# Altium PCB PCB2.PcbDoc (part 1 of 2)
Units mil, origin at the board's own origin, x right, y up, seen from the top; angles counter-clockwise.
Board outline 3937.01 x 3937.01 mil, 2 copper layers (Top Layer, Bottom Layer); 157 components, 107 nets, 472 pads, 34 vias.
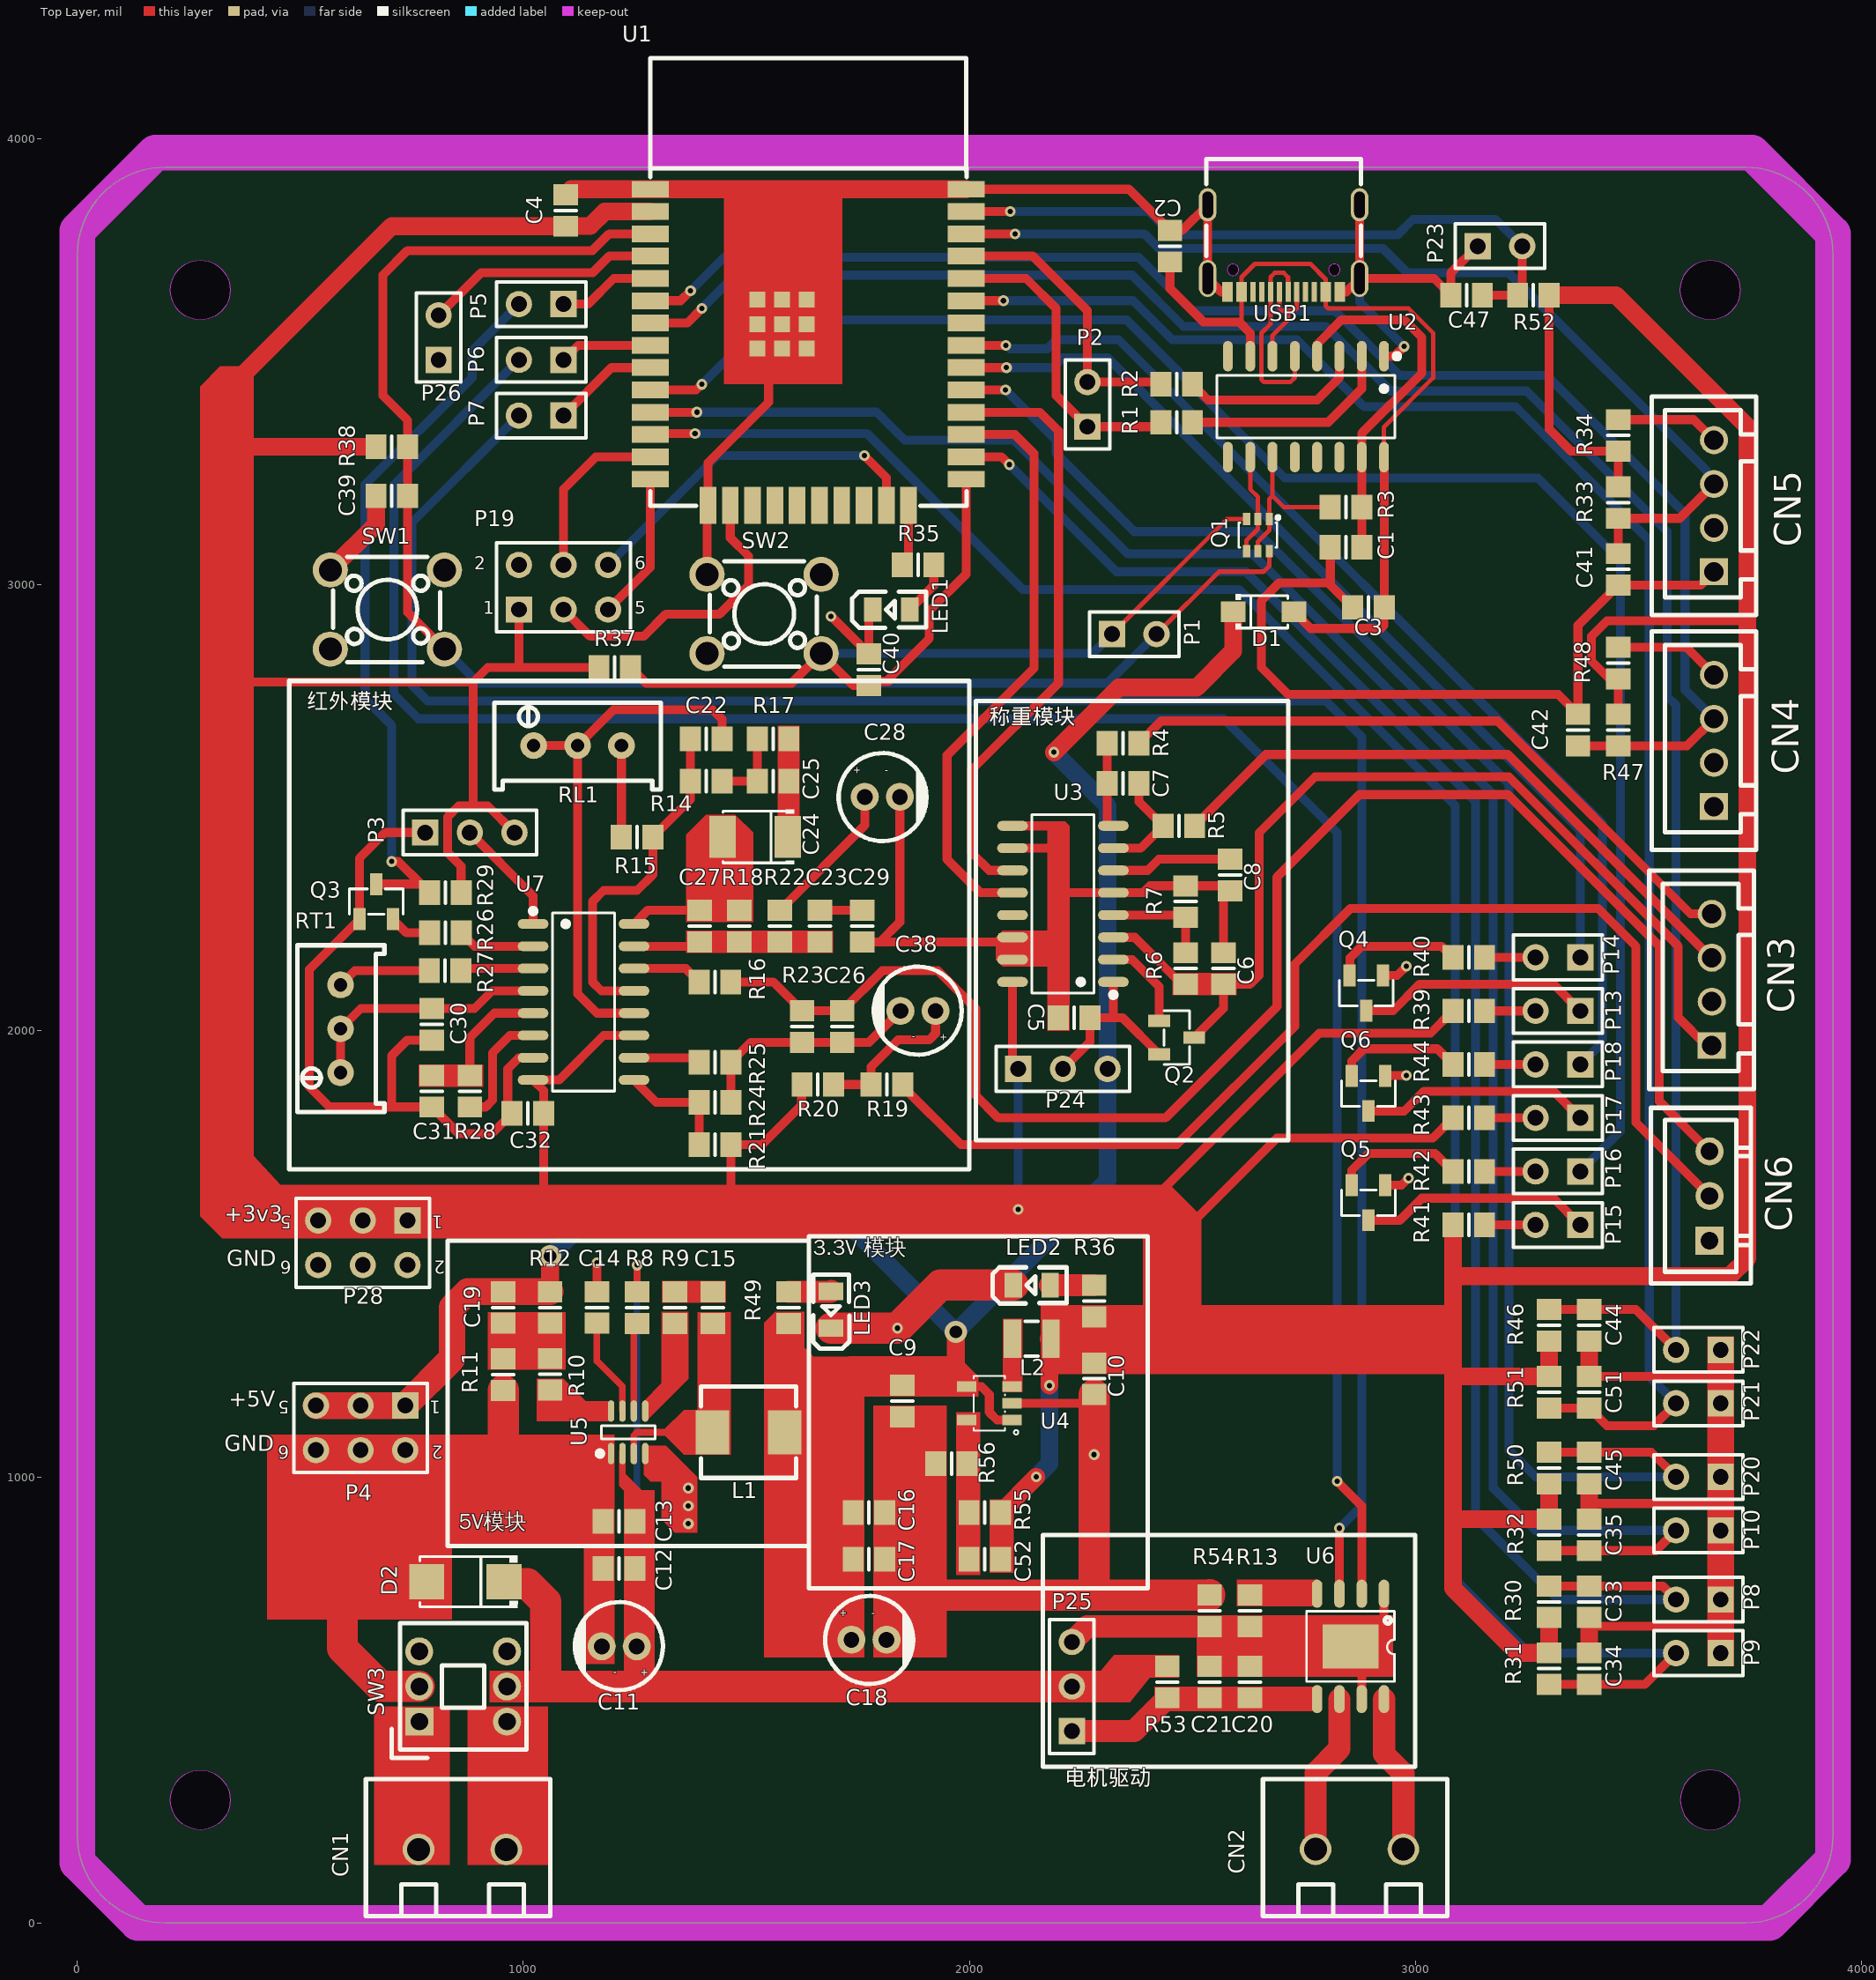
[diagram p0: Top Layer view]
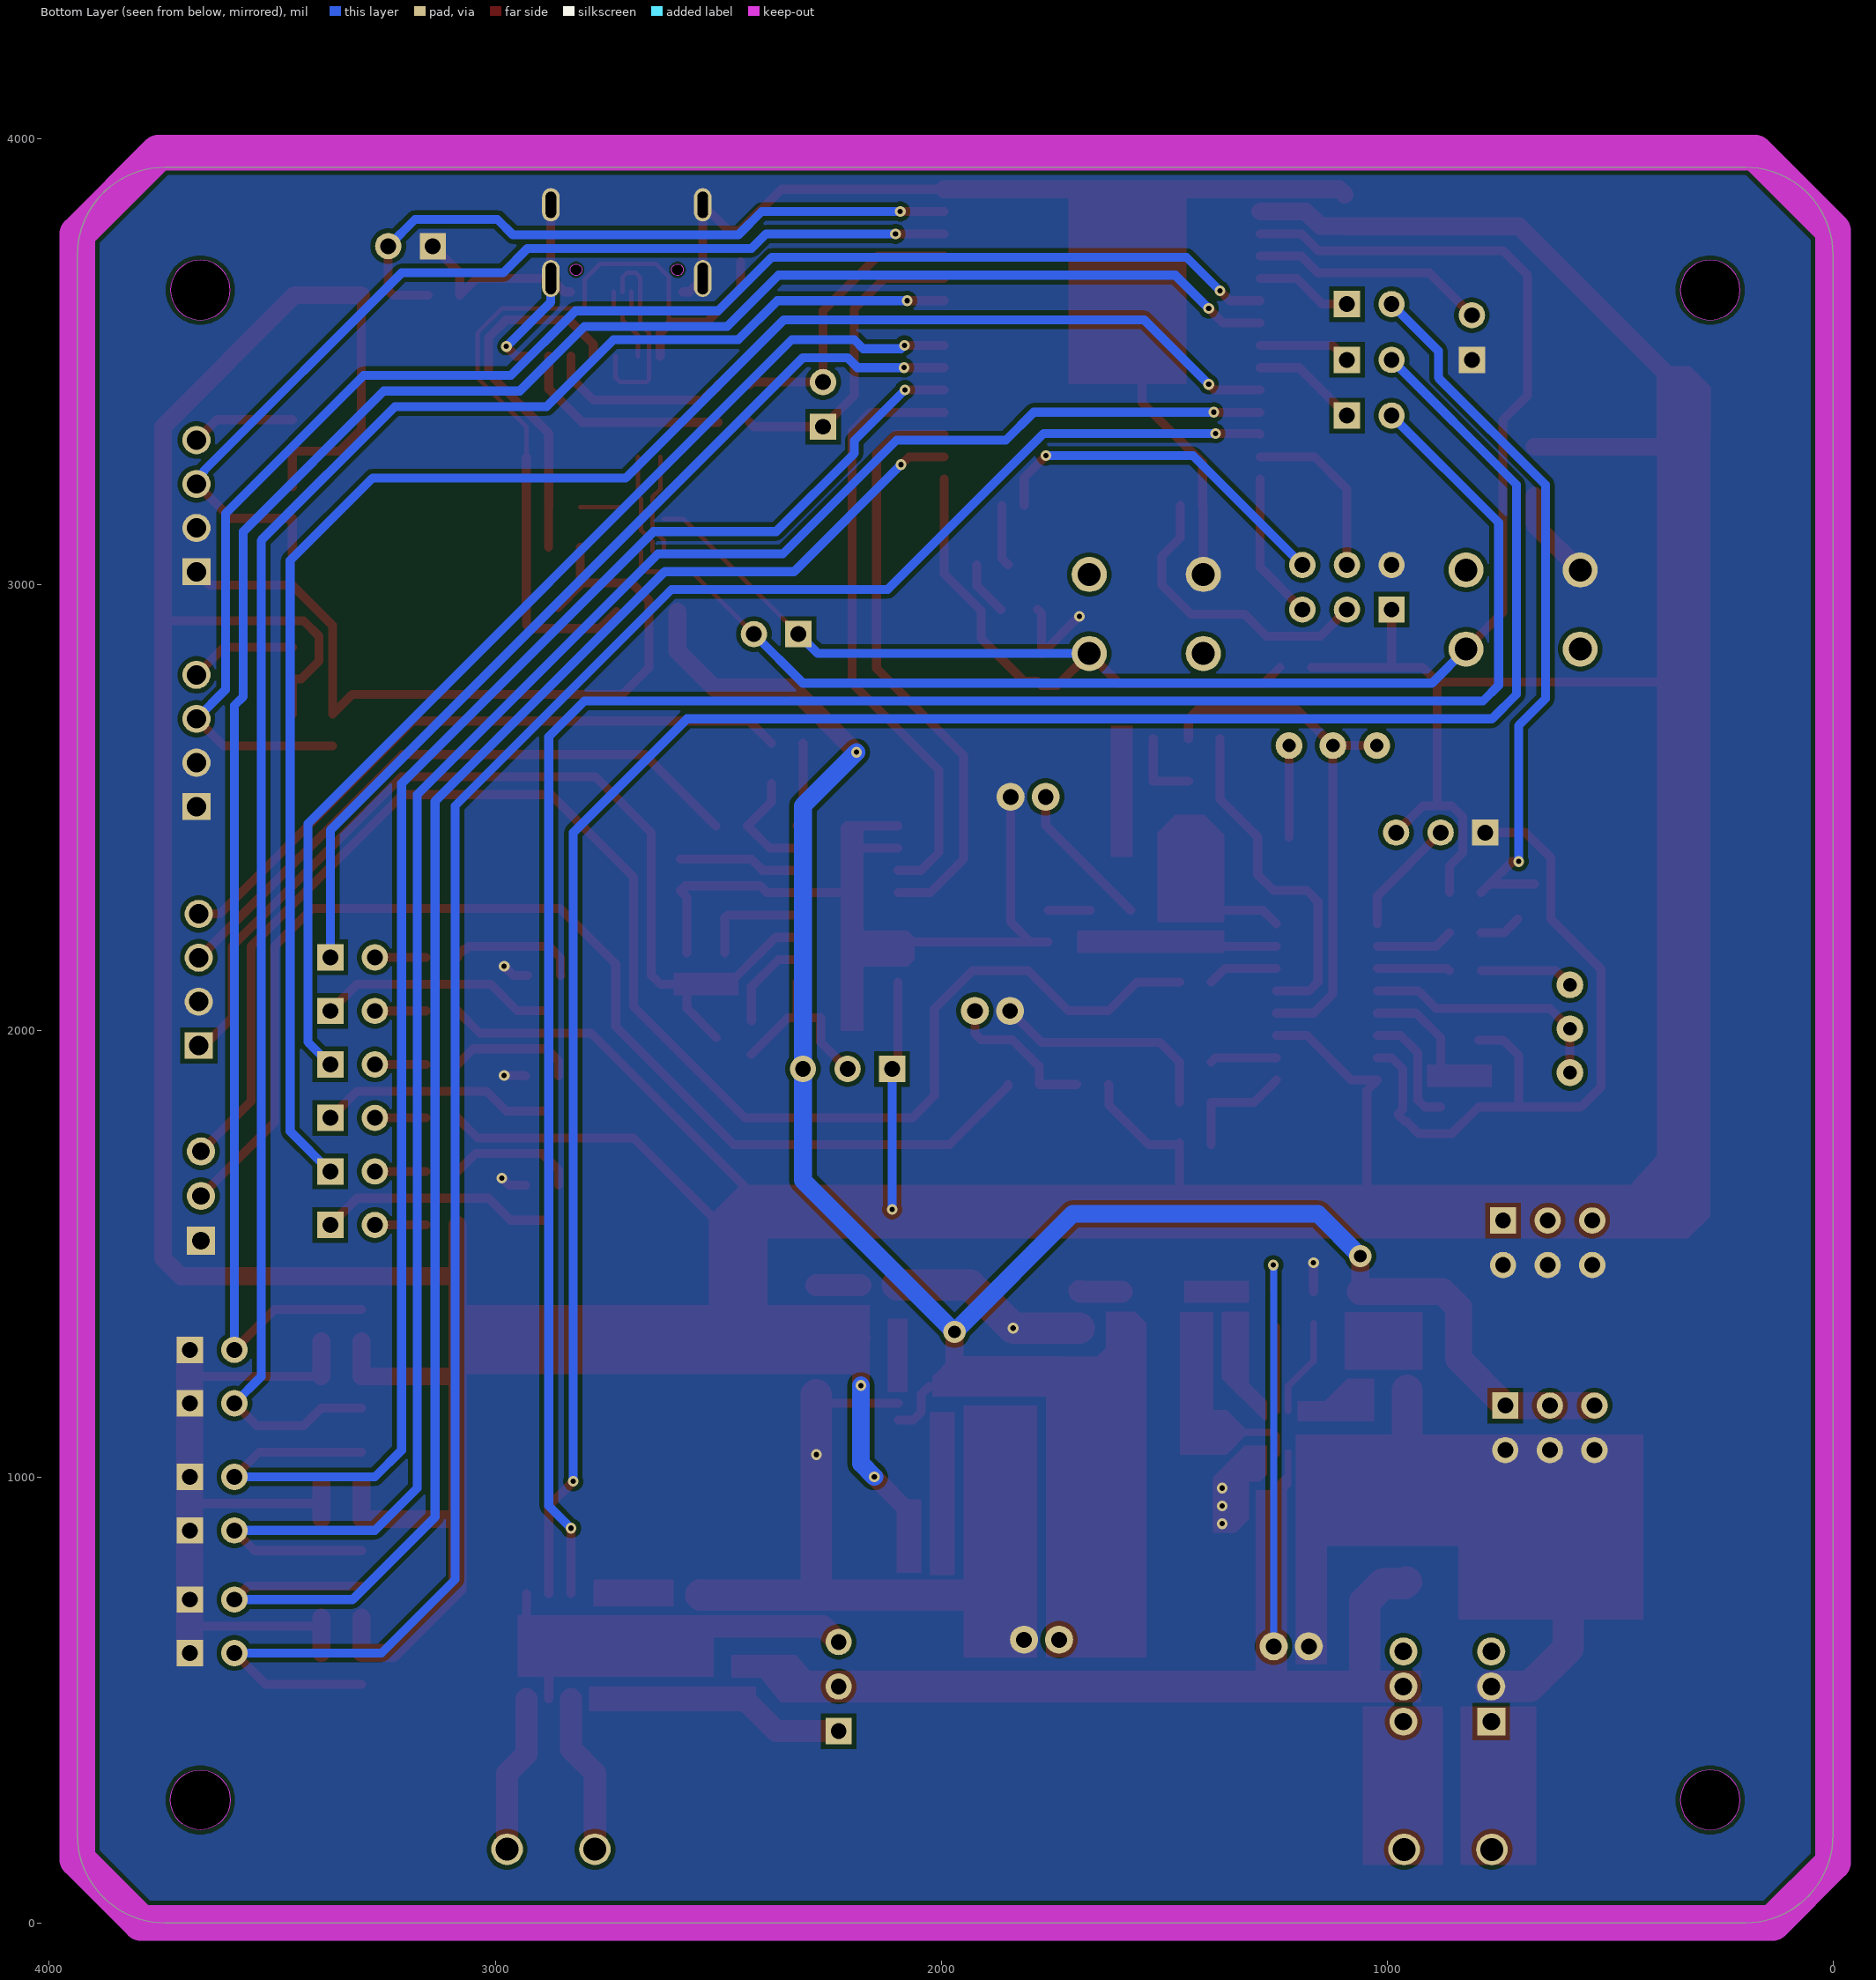
[diagram p1: Bottom Layer view, seen from below]

## Layer stack, top to bottom
Top Solder: solder mask 0.4, Solder Resist, Dk 3.5
Top Layer: signal copper 1.4
Dielectric 1: dielectric 12.6, FR-4, Dk 4.8
Bottom Layer: signal copper 1.4
Bottom Solder: solder mask 0.4, Solder Resist, Dk 3.5

## Board outline
0,196.85 0,3740.16 cw(c196.85,3740.16) 196.85,3937.01 3740.16,3937.01 cw(c3740.16,3740.16) 3937.01,3740.16 3937.01,196.85 cw(c3740.16,196.85) 3740.16,0 196.85,0 cw(c196.85,196.85)
cut-out: 3661.42,3594.49 cw(c3661.42,3661.42) 3594.49,3661.42 cw(c3661.42,3661.42) 3661.42,3728.35 cw(c3661.42,3661.42) 3728.35,3661.42 cw(c3661.42,3661.42)
cut-out: 275.59,3594.49 cw(c275.59,3661.42) 208.66,3661.42 cw(c275.59,3661.42) 275.59,3728.35 cw(c275.59,3661.42) 342.52,3661.42 cw(c275.59,3661.42)
cut-out: 275.59,208.66 cw(c275.59,275.59) 208.66,275.59 cw(c275.59,275.59) 275.59,342.52 cw(c275.59,275.59) 342.52,275.59 cw(c275.59,275.59)
cut-out: 3594.49,275.59 ccw(c3661.42,275.59) 3661.42,208.66 ccw(c3661.42,275.59) 3728.35,275.59 ccw(c3661.42,275.59) 3661.42,342.52 ccw(c3661.42,275.59)

## Design rules (kind name [scope] priority, off if disabled: settings)
Clearance Clearance_USB [InComponent('USB1') or InComponent('Q1') or InNet('D+') or InNet('D-')] p1: gap=5 ignorepadtopadclearanceinfootprint=FALSE except(0: Arc-Hole Track-Hole SMDPad-Hole THPad-Hole Via-Hole Fill-Hole Poly-Hole Region-Hole Text-Hole)
Clearance [All] p2: gap=10 ignorepadtopadclearanceinfootprint=FALSE except(0: Arc-Hole Track-Hole SMDPad-Hole THPad-Hole Via-Hole Fill-Hole Poly-Hole Region-Hole Text-Hole)
PolygonConnect [All] p1: connectstyle=Direct reliefconductorwidth=10 reliefentries=4 polygonreliefangle="90 Angle" airgapwidth=10
RoutingVias [All] p1: holewidth=12 width=24 viastyle="Through Hole" minholewidth=12 minwidth=24 maxholewidth=12 maxwidth=24
SolderMaskExpansion [All] p1: expansion=4 istentingtop=FALSE
Width [All] p1: maxlimit=70 minlimit=10 preferedwidth=10
30 further rules are at their usual default settings.

## Classes and differential pairs
component class Sensor: C5 C6 C7 C8 C22 C23 C24 C25 C26 C27 C28 C29 C30 C31 C32 C38 CN3 CN6 P3 P24 Q2 Q3 R4 R5 R6 R7 R14 R15 R16 R17 R18 R19 R20 R21 R22 R23 R24 R25 R26 R27 R28 R29 RL1 RT1 U3 U7
component class Power: C9 C10 C11 C12 C13 C14 C15 C16 C17 C18 C19 C20 C21 C52 CN1 CN2 D2 L1 L2 LED2 LED3 P4 P28 R8 R9 R10 R11 R12 R13 R36 R49 R53 R54 R55 R56 SW3 U4 U5 U6
component class IO: C33 C34 C35 C44 C45 C51 P5 P6 P7 P8 P9 P10 P13 P14 P15 P16 P17 P18 P20 P21 P22 Q4 Q5 Q6 R30 R31 R32 R39 R40 R41 R42 R43 R44 R46 R50 R51
component class IO2: C41 C42 C47 CN4 CN5 P23 P25 P26 R33 R34 R47 R48 R52
component class Core: C1 C2 C3 C4 C39 C40 D1 LED1 P1 P2 P19 Q1 R1 R2 R3 R35 R37 R38 SW1 SW2 U1 U2 USB1

## Components (designator, comment, footprint, x,y, rotation, side; value= is the part's Value field where it differs from the comment)
C1 "Cap" 6-0805_N 2845,3085 r180 top value=100nF
C2 "Cap" 6-0805_N 2450,3760 r90 top value=10uF
C3 "Cap" 6-0805_N 2895,2950 r180 top value=100nF
C4 "Cap" 6-0805_N 1095,3840 r270 top value=100nF
C5 "Cap" 6-0805_N 2235,2030 r0 top value=10uF
C6 "Cap" 6-0805_N 2570,2140 r270 top value=10uF
C7 "Cap" 6-0805_N 2345,2555 r0 top value=100nF
C8 "Cap" 6-0805_N 2585,2350 r270 top value=100nF
C9 "Cap" 6-0805_N 1850,1170 r90 top value=22uF
C10 "Cap" 6-0805_N 2280,1220 r90 top value=22uF
C11 "47uF" CAP-TH_BD5.0-P2.00-D0.5-FD-A 1215,620 r180 top
C12 "Cap" 6-0805_N 1214.57,795 r0 top value=22uF
C13 "Cap" 6-0805_N 1214.57,900 r0 top value=100nF
C14 "Cap" 6-0805_N 1165,1380 r270 top value=100nF
C15 "Cap" 6-0805_N 1425,1379.61 r90 top value=100uF
C16 "Cap" 6-0805_N 1775,920 r180 top value=22uF
C17 "Cap" 6-0805_N 1775,815 r180 top value=22uF
C18 "47uF" CAP-TH_BD5.0-P2.00-D0.5-FD-A 1775,635 r0 top
C19 "Cap" 6-0805_N 955,1380 r90 top value=33pF
C20 "Cap" 6-0805_N 2629,540 r90 top value=100nF
C21 "Cap" 6-0805_N 2539,540 r90 top value=47uF
C22 "Cap" 6-0805_N 1410,2655 r0 top value=10nF
C23 "Cap" 6-0805_N 1665,2235 r90 top value=5nF
C24 "22uF" CASE-B_3528 1520,2435 r180 top
C25 "Cap" 6-0805_N 1560,2560 r180 top value=100nF
C26 "Cap" 6-0805_N 1715,2010 r270 top value=10nF
C27 "Cap" 6-0805_N 1395,2235 r90 top value=10nF
C28 "47uF" CAP-TH_BD5.0-P2.00-D0.5-FD-A 1805,2525 r0 top
C29 "Cap" 6-0805_N 1760,2235 r90 top value=10nF
C30 "Cap" 6-0805_N 795,2015 r270 top value=10nF
C31 "Cap" 6-0805_N 795,1865 r270 top value=100nF
C32 "Cap" 6-0805_N 1010,1815 r180 top value=10nF
C33 "Cap" 6-0805_N 3390,720 r90 top value=100nF
C34 "Cap" 6-0805_N 3390,570 r270 top value=100nF
C35 "Cap" 6-0805_N 3390,870 r270 top value=100nF
C38 "47uF" CAP-TH_BD5.0-P2.00-D0.5-FD-A 1885,2045 r180 top
C39 "Cap" 6-0805_N 705,3200 r0 top value=100nF
C40 "Cap" 6-0805_N 1775,2810 r270 top value=100nF
C41 "Cap" 6-0805_N 3455,3035 r270 top value=100nF
C42 "Cap" 6-0805_N 3365,2675 r90 top value=100nF
C44 "Cap" 6-0805_N 3390,1340 r90 top value=100nF
C45 "Cap" 6-0805_N 3390,1020 r90 top value=100nF
C47 "Cap" 6-0805_N 3115,3650 r0 top value=100nF
C51 "Cap" 6-0805_N 3390,1190 r270 top value=100nF
C52 "Cap" 6-0805_N 2035,815 r180 top value=15pF
CN1 "MX126-5.0-02P-GN01-Cu-S-A" CONN-TH_2P-P5.00_MX126-5.0-GN01-02P-CU-S-A 863.42,164.61 r0 top
CN2 "MX126-5.0-02P-GN01-Cu-S-A" CONN-TH_2P-P5.00_MX126-5.0-GN01-02P-CU-S-A 2875,165 r0 top
CN3 "ZX-XH2.54-4PZZ" CONN-TH_4P-P2.50_4PIN 3665,2115 r90 top
CN4 "ZX-XH2.54-4PZZ" CONN-TH_4P-P2.50_4PIN 3670,2650.79 r90 top
CN5 "ZX-XH2.54-4PZZ" CONN-TH_4P-P2.50_4PIN 3670,3177.36 r90 top
CN6 "ZX-XH2.54-3PZZ" CONN-TH_3P-P2.54_2501S-3P 3660,1630 r90 top
D1 "DSK14" SOD-123FL_L2.7-W1.8-LS3.8-RD 2660,2940 r0 top
D2 "SMAJ12A" SMA_L4.3-W2.6-LS5.2-RD 870,765 r180 top
L1 "4.7uH" IND-SMD_L5.4-W5.2_FXL0530 1505,1100 r0 top
L2 "2.2uH" IND-SMD_L2.5-W2.0_MHCHL2520 2140,1310 r0 top
LED1 "NCD0805R1" LED0805-R-RD 1825,2945 r0 top
LED2 "NCD0805R1" LED0805-R-RD 2140,1430 r0 top
LED3 "NCD0805R1" LED0805-R-RD 1690,1375 r90 top
P1 "TP1" HDR1X2 2320,2890 r0 top
P2 "TP0" HDR1X2 2265,3355 r90 top
P3 "Header 3" HDR1X3 780,2445 r0 top
P4 "5V" HDR2X3 735,1160 r180 top
P5 "LIght connect" HDR1X2 1090,3630 r180 top
P6 "motor_in1" HDR1X2 1090,3505 r180 top
P7 "motor_in2" HDR1X2 1090,3380 r180 top
P8 "Limit_switch1" HDR1X2 3685,725 r180 top
P9 "Limit_switch2" HDR1X2 3685,605 r180 top
P10 "switch1" HDR1X2 3685,880 r180 top
P13 "Lamp1" HDR1X2 3370,2045 r180 top
P14 "Lamp1_io" HDR1X2 3370,2165 r180 top
P15 "Lamp2" HDR1X2 3370,1565 r180 top
P16 "Lamp2_io" HDR1X2 3370,1685 r180 top
P17 "Lamp3" HDR1X2 3370,1805 r180 top
P18 "Lamp3_io" HDR1X2 3370,1925 r180 top
P19 "JTAG" HDR2X3 990,2945 r0 top
P20 "switch2" HDR1X2 3685,1000 r180 top
P21 "switch3" HDR1X2 3685,1165 r180 top
P22 "switch4" HDR1X2 3685,1285 r180 top
P23 "switch5" HDR1X2 3140,3760 r0 top
P24 "SwitchHx711Power" HDR1X3 2110,1915 r0 top
P25 "TestCurrent" HDR1X3 2230,430 r90 top
P26 "IO36" HDR1X2 810,3505 r90 top
P28 "3V3" HDR2X3 740,1575 r180 top
Q1 "UMH3NTN" SOT-363_L2.0-W1.3-P0.65-LS2.1-TL 2647.2,3112.2 r270 top
Q2 "S8550" SOT-23-3_L2.9-W1.3-P1.90-LS2.4-BR 2465,1985 r180 top
Q3 "9013" SOT-23-3_L2.9-W1.3-P1.90-LS2.4-BR 670,2290 r270 top
Q4 "9013" SOT-23-3_L2.9-W1.3-P1.90-LS2.4-BR 2890,2085 r90 top
Q5 "9013" SOT-23-3_L2.9-W1.3-P1.90-LS2.4-BR 2895,1615 r90 top
Q6 "9013" SOT-23-3_L2.9-W1.3-P1.90-LS2.4-BR 2895,1860 r90 top
R1 "Res2" 6-0805_N 2465,3365 r180 top value=470
R2 "Res2" 6-0805_N 2465,3450 r180 top value=470
R3 "Res2" 6-0805_N 2845,3175 r0 top value=10K
R4 "Res2" 6-0805_N 2345,2645 r0 top value=1k
R5 "Res2" 6-0805_N 2470,2460 r0 top value=1k
R6 "Res2" 6-0805_N 2485,2140 r90 top value=20K
R7 "Res2" 6-0805_N 2485,2290 r270 top value=8.2K
R8 "Res2" 6-0805_N 1255,1379.61 r90 top value=100K
R9 "Res2" 6-0805_N 1340,1379.61 r90 top value=10R
R10 "Res2" 6-0805_N 1060,1230 r90 top value=20K
R11 "Res2" 6-0805_N 955,1229.61 r90 top value=7.5K
R12 "Res2" 6-0805_N 1060,1380 r90 top value=40.2K
R13 "Res2" 6-0805_N 2629,700 r270 top value=30K
R14 "Res2" 6-0805_N 1410,2560 r180 top value=6.8K
R15 "Res2" 6-0805_N 1255,2435 r180 top value=1.5M
R16 "Res2" 6-0805_N 1429.57,2110 r0 top value=18K
R17 "Res2" 6-0805_N 1560,2655 r180 top value=2K
R18 "Res2" 6-0805_N 1484.57,2235 r90 top value=1M
R19 "Res2" 6-0805_N 1815,1880 r180 top value=18K
R20 "Res2" 6-0805_N 1660.43,1880 r180 top value=10K
R21 "Res2" 6-0805_N 1430,1745 r180 top value=1M
R22 "Res2" 6-0805_N 1575,2235 r90 top value=18K
R23 "Res2" 6-0805_N 1625,2010 r270 top value=47K
R24 "Res2" 6-0805_N 1430,1840 r0 top value=1M
R25 "Res2" 6-0805_N 1430,1930 r0 top value=1M
R26 "Res2" 6-0805_N 825,2220 r180 top value=1M
R27 "Res2" 6-0805_N 824.57,2135 r180 top value=1M
R28 "Res2" 6-0805_N 880,1865 r90 top value=1M
R29 "Res2" 6-0805_N 825,2310 r180 top value=10K
R30 "Res2" 6-0805_N 3300,720 r90 top value=10K
R31 "Res2" 6-0805_N 3300,570 r270 top value=10K
R32 "Res2" 6-0805_N 3300,870 r270 top value=10K
R33 "Res2" 6-0805_N 3455,3185 r90 top value=10K
R34 "Res2" 6-0805_N 3455,3335.43 r270 top value=5.1K
R35 "Res2" 6-0805_N 1885,3045 r0 top value=1K
R36 "Res2" 6-0805_N 2280,1394.61 r90 top value=1K
R37 "Res2" 6-0805_N 1205,2815 r180 top value=10K
R38 "Res2" 6-0805_N 705,3310 r180 top value=10K
R39 "Res2" 6-0805_N 3120,2045 r0 top value=3.3K
R40 "Res2" 6-0805_N 3120,2165 r180 top value=10K
R41 "Res2" 6-0805_N 3120,1565 r0 top value=3.3K
R42 "Res2" 6-0805_N 3120,1685 r180 top value=10K
R43 "Res2" 6-0805_N 3120,1805 r0 top value=3.3K
R44 "Res2" 6-0805_N 3120,1925 r180 top value=10K
R46 "Res2" 6-0805_N 3300,1340 r90 top value=10K
R47 "Res2" 6-0805_N 3455,2675 r270 top value=10K
R48 "Res2" 6-0805_N 3455,2825 r90 top value=5.1K
R49 "Res2" 6-0805_N 1595,1379.61 r90 top value=3.3K
R50 "Res2" 6-0805_N 3300,1020 r90 top value=10K
R51 "Res2" 6-0805_N 3300,1190 r270 top value=10K
R52 "Res2" 6-0805_N 3265,3650 r180 top value=10K
R53 "Res2" 6-0805_N 2444,540 r90 top value=0
R54 "Res2" 6-0805_N 2539,700 r270 top value=0
R55 "Res2" 6-0805_N 2035,920 r180 top value=450K
R56 "Res2" 6-0805_N 1960,1030 r180 top value=100K
RL1 "10kΩ" RES-ADJ-TH_3P-L10.0-W10.0-P2.50-L 1121.58,2640 r0 top
RT1 "10kΩ" RES-ADJ-TH_3P-L10.0-W10.0-P2.50-L 590,2004.99 r90 top
SW1 "K2-1102DP-C4SW-04" KEY-TH_4P-L6.0-W6.0-P4.50-LS6.50 695,2945 r180 top
SW2 "K2-1102DP-C4SW-04" KEY-TH_4P-L6.0-W6.0-P4.50-LS6.50 1540,2935 r180 top
SW3 "XKB7070-Z" SW-TH_6P-L7.0-W7.0-P2.00 865,530 r180 top
U1 "ESP32-WROOM-32E-N4" WIFI-SMD_ESP32-WROOM-32E 1638.93,3533.09 r270 top
U2 "CH343G" SOP-16_L10.0-W3.9-P1.27-LS6.0-BL 2755,3400 r180 top
U3 "HX711" SOP-16_L10.0-W3.9-P1.27-LS6.0-BL 2210,2285 r90 top
U4 "TLV62568DBVR" SOT-23-5_L3.0-W1.7-P0.95-LS2.8-BR 2045,1165 r0 top
U5 "MP2315GJ-Z" TSOT-23-8_L2.9-W1.6-P0.65-LS2.8-BR 1235,1100 r270 top
U6 "DRV8871DDA" POWERPAD-SO-8_L4.9-W3.9-P1.27-LS6.0-BL-EP 2855,620 r180 top
U7 "BISS0001" SOP-16_L10.0-W3.9-P1.27-LS6.0-BL 1135,2065 r270 top
USB1 "TYPEC-304J-BCP16" USB-C-SMD_TYPEC-304J-BCP16 2705,3755 r180 top

## Footprints (in the part's own frame and the unit in brackets; to place one, negate y for a bottom-side part, rotate by r counter-clockwise, add the part's x,y. Pads: shape width x height; smd on the part's side, far side on the other; paste and mask are expansions set on the pad)
6-0805_N [mm] "Chip Resistor, Body 2.0x1.2mm, IPC Medium Density"
  rect 1.2x1.4 smd: 1(-0.9,0) 2(0.9,0)
  silkscreen extent 0,-0.6 0,0.6, body extent -1.07,-0.7 1.07,0.7, height 0.7
CAP-TH_BD5.0-P2.00-D0.5-FD-A [mm]
  round 1.6 hole 0.9 paste+0 mask+0.05: 1(-1,0) 2(1,0)
  silkscreen extent -2.49,-2.52 2.6,2.49
CASE-B_3528 [mil]
  rect 59.3x93.54 smd: 1(-73.25,0) 2(73.25,0)
  silkscreen extent -87,-61 72,61
CONN-TH_2P-P5.00_MX126-5.0-GN01-02P-CU-S-A [mm]
  round 1.8 hole 1.3 paste+0 mask+0.05: 1(-2.5,0) 2(2.5,0)
  silkscreen extent -5.5,-3.8 5,4
CONN-TH_3P-P2.54_2501S-3P [mm]
  rect 1.6x1.6 hole 1: 1(-2.54,0)
  round 1.6 hole 1: 2(0,0) 3(2.54,0)
  silkscreen extent -4.98,-2.35 5.02,3.35
CONN-TH_4P-P2.50_4PIN [mm]
  rect 1.524x1.6 hole 1.1: 1(-3.75,0)
  round 1.6 hole 1.1: 2(-1.25,0) 3(1.25,0) 4(3.75,0)
  silkscreen extent -6.22,-2.41 6.22,3.56
HDR1X2 [mm] "Connector; Header; 2 Position"
  rect 1.5x1.5 hole 0.9: 1(0,0)
  round 1.5 hole 0.9: 2(2.54,0)
  silkscreen extent -1.27,-1.27 3.81,1.27
HDR1X3 [mm] "Connector; Header; 3 Position"
  rect 1.5x1.5 hole 0.9: 1(0,0)
  round 1.5 hole 0.9: 2(2.54,0) 3(5.08,0)
  silkscreen extent -1.27,-1.27 6.35,1.27
HDR2X3 [mm] "Connector; Header; 3x2 Position"
  rect 1.5x1.5 hole 0.9: 1(0,0)
  round 1.5 hole 0.9: 2(0,2.54) 3(2.54,0) 4(2.54,2.54) 5(5.08,0) 6(5.08,2.54)
  silkscreen extent -1.27,-1.27 6.35,3.81
IND-SMD_L2.5-W2.0_MHCHL2520 [mm]
  rect 1x2.2 smd: 1(-1.1,0) 2(1.1,0)
  silkscreen extent -0.37,-1 0.37,1
IND-SMD_L5.4-W5.2_FXL0530 [mm]
  rect 1.9x2.5 smd: 1(-2.05,0) 2(2.05,0)
  silkscreen extent -2.7,-2.6 2.7,2.6
KEY-TH_4P-L6.0-W6.0-P4.50-LS6.50 [mm]
  round 2 hole 1.3: 1(-3.25,2.25) 2(3.25,2.25) 3(-3.25,-2.25) 4(3.25,-2.25)
  silkscreen extent -3,-3 3.1,3
LED0805-R-RD [mm]
  rect 1x1.4 smd: 1(1.05,0) 2(-1.05,0)
  silkscreen extent -2.22,-1.04 1.99,1.01
POWERPAD-SO-8_L4.9-W3.9-P1.27-LS6.0-BL-EP [mm]
  oval 0.6x1.6 smd: 1(-1.905,-3) 2(-0.635,-3) 3(0.635,-3) 4(1.905,-3) 5(1.905,3) 6(0.635,3) 7(-0.635,3) 8(-1.905,3)
  rect 3.2x2.5 smd: 9(0,0)
  silkscreen extent -2.5,-2 2.5,2
RES-ADJ-TH_3P-L10.0-W10.0-P2.50-L [mil]
  round 60 hole 30: 1(-98.43,0) 2(0.01,0) 3(98.42,0)
  silkscreen extent -187,-98 187,96
SMA_L4.3-W2.6-LS5.2-RD [mm]
  rect 2x2 smd: 1(-2.2,0) 2(2.2,0)
  silkscreen extent -2.98,-1.5 2.6,1.5
SOD-123FL_L2.7-W1.8-LS3.8-RD [mm]
  rect 1.4x1.2 smd: 1(-1.735,0) 2(1.735,0)
  silkscreen extent -1.6,-1 1.38,1
SOP-16_L10.0-W3.9-P1.27-LS6.0-BL [mm]
  oval 0.56x1.745 smd: 1(-4.445,-2.872) 2(-3.175,-2.872) 3(-1.905,-2.872) 4(-0.635,-2.872) 5(0.635,-2.872) 6(1.905,-2.872) 7(3.175,-2.872) 8(4.445,-2.872) 9(4.445,2.872) 10(3.175,2.872) 11(1.905,2.872) 12(0.635,2.872) 13(-0.635,2.872) 14(-1.905,2.872) 15(-3.175,2.872) 16(-4.445,2.872)
  silkscreen extent -5.33,-3.02 5.08,1.77
SOT-23-3_L2.9-W1.3-P1.90-LS2.4-BR [mm]
  rect 1.25x0.7 smd: 1(1,-0.95) 2(1,0.95) 3(-1,0)
  silkscreen extent -0.73,-1.53 0.73,1.53
SOT-23-5_L3.0-W1.7-P0.95-LS2.8-BR [mm]
  rect 1.1x0.6 smd: 1(1.3,-0.95) 2(1.3,0) 3(1.3,0.95) 4(-1.3,0.95) 5(-1.3,-0.95)
  silkscreen extent -0.9,-1.78 1.65,1.55
SOT-363_L2.0-W1.3-P0.65-LS2.1-TL [mm]
  rect 0.7x0.42 smd: 1(-0.92,0.65) 2(-0.92,0) 3(-0.92,-0.65) 4(0.92,-0.65) 5(0.92,0) 6(0.92,0.65)
  silkscreen extent -1.09,-1.1 0.7,1.24
SW-TH_6P-L7.0-W7.0-P2.00 [mm]
  rect 1.6x1.6 hole 1: 1(2.5,2)
  round 1.6 hole 1: 2(2.5,0) 3(2.5,-2) 4(-2.5,2) 5(-2.5,0) 6(-2.5,-2)
  silkscreen extent -3.6,-3.6 4.06,4.06
TSOT-23-8_L2.9-W1.6-P0.65-LS2.8-BR [mil]
  oval 48.11x14.33 smd: 1(47.68,-38.39) 2(47.68,-12.8) 3(47.68,12.79) 4(47.68,38.39) 5(-47.68,38.39) 6(-47.68,12.79) 7(-47.68,-12.8) 8(-47.68,-38.39)
  silkscreen extent -15,-69 54,60
USB-C-SMD_TYPEC-304J-BCP16 [mm]
  oval 1x2.1 hole 0.6 slot 1.8 at 90 deg: 13(-4.325,1.719) 14(4.325,1.719)
  oval 1x1.9 hole 0.6 slot 1.5 at 90 deg: 15(-4.325,-2.481) 16(4.325,-2.481)
  rect 0.6x1.15 smd paste-100 mask+0.051: A1B12(-3.2,2.481) A4B9(-2.4,2.481) B1A12(3.2,2.481) B4A9(2.4,2.481)
  rect 0.3x1.15 smd paste-100 mask+0.051: A5(-1.25,2.481) A6(-0.25,2.481) A7(0.25,2.481) A8(1.25,2.481) B5(1.75,2.481) B6(0.75,2.481) B7(-0.75,2.481) B8(-1.75,2.481)
  Keep-Out Layer board cut-out: -2.565,1.219 -2.566,1.283 -2.616,1.401 -2.707,1.491 -2.826,1.54 -2.954,1.54 -3.073,1.491 -3.164,1.401 -3.214,1.283 -3.215,1.219 -3.215,1.219 -3.214,1.155 -3.164,1.037 -3.073,0.947 -2.954,0.898 -2.826,0.898 -2.707,0.946 -2.616,1.037 -2.566,1.155 -2.565,1.219 -2.565,1.219
  Keep-Out Layer board cut-out: 3.215,1.219 3.214,1.283 3.164,1.401 3.073,1.491 2.954,1.54 2.826,1.54 2.707,1.491 2.616,1.401 2.566,1.283 2.565,1.219 2.565,1.219 2.566,1.155 2.616,1.037 2.707,0.947 2.826,0.898 2.954,0.898 3.073,0.946 3.164,1.037 3.214,1.155 3.215,1.219 3.215,1.219
  silkscreen extent -4.4,-5.08 4.4,0.44
WIFI-SMD_ESP32-WROOM-32E [mm]
  rect 0.95x2.1 smd: 1(-9.003,-9) 2(-7.733,-9) 3(-6.463,-9) 4(-5.193,-9) 5(-3.923,-9) 6(-2.653,-9) 7(-1.383,-9) 8(-0.113,-9) 9(1.157,-9) 10(2.427,-9) 11(3.697,-9) 12(4.967,-9) 13(6.237,-9) 14(7.507,-9) 25(7.507,9) 26(6.237,9) 27(4.967,9) 28(3.697,9) 29(2.427,9) 30(1.157,9) 31(-0.113,9) 32(-1.383,9) 33(-2.653,9) 34(-3.923,9) 35(-5.193,9) 36(-6.463,9) 37(-7.733,9) 38(-9.003,9)
  rect 2.1x0.95 smd: 15(9.003,-5.715) 16(9.003,-4.445) 17(9.003,-3.175) 18(9.003,-1.905) 19(9.003,-0.635) 20(9.003,0.635) 21(9.003,1.905) 22(9.003,3.175) 23(9.003,4.445) 24(9.003,5.715)
  rect 0.9x0.9 smd: 39(-2.722,-0.1) 39(-2.722,-2.9) 39(-2.722,-1.5) 39(-1.322,-0.1) 39(-1.322,-1.5) 39(-1.322,-2.9) 39(0.078,-0.1) 39(0.078,-1.5) 39(0.078,-2.9)
  silkscreen extent -16.48,-9 9.02,9.02

## Part data
C1 C2 C3 C4 C5 C6 C7 C8 C9 C10 C12 C13 C14 C15 C16 C17 C19 C20 C21 C22 C23 C25 C26 C27 C29 C30 C31 C32 C33 C34 C35 C39 C40 C41 C42 C44 C45 C47 C51 C52: "Capacitor", LatestRevisionDate=17-Jul-2002, LatestRevisionNote="Re-released for DXP Platform.", PackageDescription="Radial Cap, Thru-Hole; 2 Leads; 0.3 in Pin Spacing", PackageReference=RAD-0.3, Published=8-Jun-2000, Publisher="Altium Limited"
C11 C18 C28 C38: library part 01EC1119, Equivalent Series Resistance(ESR)=1Ω@100kHz, JLCPCB Part Class=扩展库, LCSC Part Name="47uF ±20% 35V", Lifetime @ Temp=7000hrs@105℃, Manufacturer=KNSCHA(科尼盛), Operating Temperature=-55℃~+105℃, Rated Voltage=35V, Ripple Current=135mA@100kHz, Tolerance=±20%, Add into BOM=yes, Convert to PCB=yes, Datasheet=https://atta.szlcsc.com/upload/public/pdf/source/20210521/C2833295_D5EF56CA4AAF67B2F3976F630DF1C3A7.pdf, Device=01EC1119, L=11mm, Lead Spacing=2mm, Manufacturer Part=01EC1119, Name=47uF35V, Supplier=LCSC, Supplier Footprint=插件,D5xL11mm, Supplier Part=C2833295, Symbol=01EC1119, φD=5mm
C24: library part TAJB226K016RNJ, Equivalent Series Resistance(ESR)=2.3Ω@100kHz, JLCPCB Part Class=扩展库, LCSC Part Name="22uF ±10% 16V", Manufacturer="Kyocera AVX", Operating Temperature=-55℃~+125℃, Rated Voltage=16V, Tolerance=±10%, Add into BOM=yes, Convert to PCB=yes, Datasheet=https://atta.szlcsc.com/upload/public/pdf/source/20160107/1457707750344.pdf, Device=TAJB226K016RNJ, Manufacturer Part=TAJB226K016RNJ, Name=22uF16V, Supplier=LCSC, Supplier Footprint=CASE-B-3528, Supplier Part=C8020, Symbol=TAJB226K016RNJ
CN1 CN2: Color=绿色, Current Rating (Max)=10A, JLCPCB Part Class=扩展库, LCSC Part Name="5mm 1x2P 排数:1 每排P数:2 直插", Manufacturer=MAX(迈旭), Operating Temperature Range=-40℃~+105℃, Voltage Rating (Max)=300V, Add into BOM=yes, Contact Material=铜合金, Contact Plating=锡, Convert to PCB=yes, Datasheet=https://atta.szlcsc.com/upload/public/pdf/source/20230914/2B012B5258BE925E2417FA81B30CB923.pdf, Device=MX126-5.0-02P-GN01-Cu-S-A, Manufacturer Part=MX126-5.0-02P-GN01-Cu-S-A, Mounting Style=直插, Number of Pins=2P, Number of PINs Per Row=2, Number of Rows=1, Pitch=5mm, Structure=1x2P, Supplier=LCSC, Supplier Footprint=插件,P=5mm, Supplier Part=C5188434, Symbol=MX126-5.0-GN01-02P-CU-S-A, Wire Gauge - AWG=14~26, Wire Gauge - mm2=2.5
  CN1: MX126-5.0-02P-GN01-Cu-S-A=PowerInput
  CN2: MX126-5.0-02P-GN01-Cu-S-A=motorOutput
CN3 CN4 CN5 CN6: Current Rating (Max)=3A, JLCPCB Part Class=扩展库, Manufacturer=Megastar(兆星), Operating Temperature Range=-25℃~+85℃, Add into BOM=yes, Contact Material=黄铜, Contact Plating=锡, Convert to PCB=yes, Mounting Style=直插, Number of Rows=1, Pitch=2.54mm, Reference Series=XH, Row Spacing=-, Supplier=LCSC, Supplier Footprint=插件,P=2.54mm
  CN3: Datasheet=https://atta.szlcsc.com/upload/public/pdf/source/20230619/B529A2163E0159A644AB3383D208FB03.pdf, Device=ZX-XH2.54-4PZZ, LCSC Part Name=ZX-XH2.54-4PZZ, Manufacturer Part=ZX-XH2.54-4PZZ, Name=4PZZ, Number of Pins=4P, Number of PINs Per Row=4, Pins Structure=1x4P, Supplier Part=C7429634, Symbol=ZX-XH2.54-4PZZ
  CN4: Datasheet=https://atta.szlcsc.com/upload/public/pdf/source/20230619/B529A2163E0159A644AB3383D208FB03.pdf, Device=ZX-XH2.54-4PZZ, LCSC Part Name=ZX-XH2.54-4PZZ, Manufacturer Part=ZX-XH2.54-4PZZ, Name=optocoupler1, Number of Pins=4P, Number of PINs Per Row=4, Pins Structure=1x4P, Supplier Part=C7429634, Symbol=ZX-XH2.54-4PZZ
  CN5: Datasheet=https://atta.szlcsc.com/upload/public/pdf/source/20230619/B529A2163E0159A644AB3383D208FB03.pdf, Device=ZX-XH2.54-4PZZ, LCSC Part Name=ZX-XH2.54-4PZZ, Manufacturer Part=ZX-XH2.54-4PZZ, Name=optocoupler2, Number of Pins=4P, Number of PINs Per Row=4, Pins Structure=1x4P, Supplier Part=C7429634, Symbol=ZX-XH2.54-4PZZ
  CN6: Datasheet=https://atta.szlcsc.com/upload/public/pdf/source/20230619/AE17037A2CFDBE8D9CBA775D61AD0A84.pdf, Device=ZX-XH2.54-3PZZ, LCSC Part Name=ZX-XH2.54-3PZZ, Manufacturer Part=ZX-XH2.54-3PZZ, Name=RE200B, Number of Pins=3P, Number of PINs Per Row=3, Pins Structure=1x3P, Supplier Part=C7429633, Symbol=ZX-XH2.54-3PZZ
D1: library part DSK14_C7502711, Forward Voltage (Vf@If)=550mV@1A, JLCPCB Part Class="Extended Part", LCSC Part Name="电压:40V 电流:1A", Manufacturer=宏迦橙, Rectified Current=1A, Reverse Leakage Current (Ir)=500uA, Reverse Voltage (Vr)=40V, Add into BOM=yes, Convert to PCB=yes, Datasheet=https://atta.szlcsc.com/upload/public/pdf/source/20240814/0CEB0199A0D437A3D615A8EF61306643.pdf, Device=DSK14_C7502711, Diode Configuration=独立式, Manufacturer Part=DSK14, Name=DSK14, Supplier=LCSC, Supplier Footprint=SOD-123FL, Supplier Part=C7502711, Symbol=DSK14_C7502711
D2: library part SMAJ12A_C148213, Breakdown Voltage=13.3V, JLCPCB Part Class=扩展库, LCSC Part Name="单向TVS 12V截止", Manufacturer=Littelfuse(美国力特), Maximum Clamping Voltage=19.9V, Peak Pulse Current (Ipp)@10/1000us=20.1A, Peak Pulse Power Dissipation (Ppp)@10/1000us=400W, Reverse Stand-Off Voltage (Vrwm)=12V, Add into BOM=yes, Convert to PCB=yes, Datasheet=https://atta.szlcsc.com/upload/public/pdf/source/20190402/C374025_5ACE77BC72947DF13CF0CBC7F8B57228.pdf, Device=SMAJ12A_C148213, Manufacturer Part=SMAJ12A, Name=SMAJ12A, polarity=单向, Supplier=LCSC, Supplier Footprint=SMA(DO-214AC), Supplier Part=C148213, Symbol=SMAJ12A-C148213, Type=TVS
L1: library part FXL0530-4R7-M, DC Resistance (DCR)=60mΩ, JLCPCB Part Class=扩展库, LCSC Part Name="4.7uH ±20% 5A", Manufacturer=cjiang(长江微电), Rated Current=4.5A, Saturation Current (Isat)=5A, Tolerance=±20%, 4R7=4.7uH, Add into BOM=yes, Convert to PCB=yes, Datasheet=https://atta.szlcsc.com/upload/public/pdf/source/20240426/3189EA8206330E2108542F9E34E540E7.pdf, Device=FXL0530-4R7-M, Manufacturer Part=FXL0530-4R7-M, Supplier=LCSC, Supplier Footprint=SMD,5.2x5.4mm, Supplier Part=C177246, Symbol=FXL0530-4R7-M, Type=一体成型电感
L2: library part FTC252012S2R2MBCA, DC Resistance (DCR)=55mΩ, JLCPCB Part Class=扩展库, LCSC Part Name="2.2uH ±20% 3.8A", Manufacturer=cjiang(长江微电), Rated Current=3A, Saturation Current (Isat)=3.8A, Tolerance=±20%, Add into BOM=yes, Convert to PCB=yes, Datasheet=https://atta.szlcsc.com/upload/public/pdf/source/20230602/8FFEDA9C0247A92A0D4B67554BFE4091.pdf, Device=FTC252012S2R2MBCA, Manufacturer Part=FTC252012S2R2MBCA, Name=2.2uH, Supplier=LCSC, Supplier Footprint=1008, Supplier Part=C5832372, Symbol=FTC252012S2R2MBCA, Type=一体成型电感
LED1 LED2 LED3: Color Temperature=-, Emitted Color=红色, Forward Current=20mA, Forward Voltage (VF)=1.6V~2.6V, JLCPCB Part Class=基础库, Lens Color=无色透明透镜, Manufacturer=国星光电, Operating Temperature=-30℃~+85℃, Power Dissipation=65mW, Add into BOM=yes, Convert to PCB=yes, Datasheet=https://atta.szlcsc.com/upload/public/pdf/source/20200820/C84256_F0A75A43B3EAD75808600A0514C76B99.pdf, Device=NCD0805R1, Diode Configuration=独立二极管, Dominant Wavelength=615nm~630nm, Lamp Holder Type=-, LCSC Part Name=NCD0805R1, Luminous Intensity=67mcd~195mcd, Manufacturer Part=NCD0805R1, Mounting Sytle=-, Name=LED, Peak Wavelength=-, Supplier=LCSC, Supplier Footprint=0805, Supplier Part=C84256, Symbol=FC-2012HRK-620D, Viewing Angle=130°
P1 P2 P5 P6 P7 P8 P9 P10 P13 P14 P15 P16 P17 P18 P20 P21 P22 P23 P26: library part "Header 2", "Header, 2-Pin", LatestRevisionDate=17-Jul-2002, LatestRevisionNote="Re-released for DXP Platform.", Publisher="Altium Limited"
P3: "Header, 3-Pin", LatestRevisionDate=17-Jul-2002, LatestRevisionNote="Re-released for DXP Platform.", Publisher="Altium Limited"
P4 P19 P28: library part "Header 3X2", "Header, 3-Pin, Dual row", LatestRevisionDate=17-Jul-2002, LatestRevisionNote="Re-released for DXP Platform.", Publisher="Altium Limited"
P24 P25: library part "Header 3", "Header, 3-Pin", LatestRevisionDate=17-Jul-2002, LatestRevisionNote="Re-released for DXP Platform.", Publisher="Altium Limited"
Q1: Collector Current (Ic)=100mA, Collector-Emitter Breakdown Voltage (Vceo)=50V, DC Current Gain (hFE@Ic,Vce)=100@1mA,5V, JLCPCB Part Class=扩展库, LCSC Part Name="耐压:50V 电流:100mA", Manufacturer=ROHM(罗姆), Power Dissipation (Pd)=150mW, Add into BOM=yes, Convert to PCB=yes, Datasheet=https://atta.szlcsc.com/upload/public/pdf/source/20170726/C123008_1501054486996843958.pdf, Device=UMH3NTN, Manufacturer Part=UMH3NTN, Name=UMH3NTN, Supplier=LCSC, Supplier Footprint=SOT-363, Supplier Part=C123008, Symbol=UMH3NTN, Transistor Type=-
Q2: library part S8550_C20069126, Collector Current (Ic)=500mA, Collector Cut-Off Current (Icbo)=100nA, Collector-Emitter Breakdown Voltage (Vceo)=25V, Collector-Emitter Saturation Voltage (VCE(sat)@Ic,Ib)=500mV@1.0A,50mA, DC Current Gain (hFE@Ic,Vce)=120@500mA,1.0V, JLCPCB Part Class=扩展库, LCSC Part Name="PNP 电流:500mA 耐压:25V", Manufacturer=宏迦橙, Operating Temperature=-55℃~+150℃, Power Dissipation (Pd)=300mW, Transition Frequency (fT)=150MHz, Add into BOM=yes, Convert to PCB=yes, Datasheet=https://atta.szlcsc.com/upload/public/pdf/source/20231229/A44F382554E15234B24C32D7C3971EED.pdf, Device=S8550_C20069126, Manufacturer Part=S8550, Name=S8550, Supplier=LCSC, Supplier Footprint=SOT-23, Supplier Part=C20069126, Symbol=S8550_C20069126, Transistor Type=PNP
Q3 Q4 Q5 Q6: library part 2N3904, "NPN General Purpose Amplifier", ComponentLink1Description="Manufacturer Link", ComponentLink1URL=http://www.fairchildsemi.com/, ComponentLink2Description=Datasheet, ComponentLink2URL=http://www.fairchildsemi.com/ds/2N%2F2N3904.pdf, DatasheetVersion=1997, LatestRevisionDate=15-Jan-2003, LatestRevisionNote="PCB Footprint 'BCY-W3/D4.7' replaced", PackageDescription="TO, Flat Index; 3 In-Line, Axial Leads; Body Dia. 4.5mm; Leads 0.51 x 0.48 mm (max)", PackageReference=TO-92A, PackageVersion=Sep-1998, Published=8-Jun-2000, Publisher="Altium Limited"
R1 R2 R3 R4 R5 R6 R7 R8 R9 R10 R11 R12 R13 R14 R15 R16 R17 R18 R19 R20 R21 R22 R23 R24 R25 R26 R27 R28 R29 R30 R31 R32 R33 R34 R35 R36 R37 R38 R39 R40 R41 R42 R43 R44 R46 R47 R48 R49 R50 R51 R52 R53 R54 R55 R56: "Resistor", LatestRevisionDate=17-Jul-2002, LatestRevisionNote="Re-released for DXP Platform.", PackageDescription="Axial Device, Thru-Hole; 2 Leads; 0.4 in Pin Spacing", PackageReference=AXIAL-0.4, Published=8-Jun-2000, Publisher="Altium Limited"
RL1 RT1: library part 3296W-1-103, JLCPCB Part Class=扩展库, LCSC Part Name="10kΩ ±10%", Manufacturer=BOCHEN(博晨), Tolerance=±10%, Add into BOM=yes, Convert to PCB=yes, Datasheet=https://atta.szlcsc.com/upload/public/pdf/source/20171114/C118954_15106326646611117443.pdf, Device=3296W-1-103, Manufacturer Part=3296W-1-103, Name=1M, Supplier=LCSC, Supplier Footprint=插件, Supplier Part=C118954, Symbol=3296W-1-103
SW1 SW2: Contact Current=50mA, Insulation Resistance=100MΩ, JLCPCB Part Class=扩展库, LCSC Part Name=轻触按键开关6*6*5, Manufacturer=韩国韩荣, Operating Force=2.5N, Operating Temperature=-25℃~+85℃, Voltage Rating (DC)=12V, Actuator Style=圆形按钮, Add into BOM=yes, Circuit=单刀单掷, Convert to PCB=yes, Datasheet=https://atta.szlcsc.com/upload/public/pdf/source/20210810/D0CD9D77408EACA829A5E533AC6E5B1E.pdf, Device=K2-1102DP-C4SW-04, K2-1102DP-C4SW-04=K2-1102DP-C4SW-04, Manufacturer Part=K2-1102DP-C4SW-04, Mechanical Life=10万次, Mounting Style=直插, Supplier=LCSC, Supplier Footprint=插件, Supplier Part=C110153, Switch Height=5mm, Switch Length=6mm, Switch Width=6mm, Symbol=K2-1102DP-C4SW-04, With Lamp=-
SW3: Actuator/Cap Color=蓝色, Contact Current=100mA, Insulation Resistance=100MΩ, IP Rating=-, JLCPCB Part Class=扩展库, LCSC Part Name="按键开关   7*7插件自锁 蓝白黑", Manufacturer="XKB Connectivity(中国星坤)", Operating Force=160gf, Operating Temperature=-15℃~+55℃, Voltage Rating (AC)=250V, Voltage Rating (DC)=30V, Actuator Style=矩形按钮, Add into BOM=yes, Convert to PCB=yes, Datasheet=https://atta.szlcsc.com/upload/public/pdf/source/20211015/75A682A27A424BDE8D93C2CFA14C38FE.pdf, Device=XKB7070-Z, Manufacturer Part=XKB7070-Z, Mechanical Life=10万次, Mounting Style=直插, Pin Style=PC引脚, Self Lock / No Lock=自锁, Supplier=LCSC, Supplier Footprint=插件, Supplier Part=C318863, Symbol=XKB7070-Z, With Lamp=不带, XKB7070-Z=PowerButton
U1: JLCPCB Part Class=扩展库, LCSC Part Name="通用型Wi-Fi+BT+BLE MCU模组", Manufacturer=ESPRESSIF(乐鑫), Add into BOM=yes, Convert to PCB=yes, Datasheet=https://atta.szlcsc.com/upload/public/pdf/source/20220601/0020821B65DE5740BBACA5FACC5CF3B6.pdf, Device=ESP32-WROOM-32E-N4, ESP32-WROOM-32E-N4=ESP32-WROOM-32E-N4, Manufacturer Part=ESP32-WROOM-32E-N4, Supplier=LCSC, Supplier Footprint=SMD,18x25.5mm, Supplier Part=C701341, Symbol=ESP32-WROOM-32E(4MB)
U2: JLCPCB Part Class=扩展库, Manufacturer=WCH(南京沁恒), Add into BOM=yes, Applications Function=-, Convert to PCB=yes, Datasheet=https://atta.szlcsc.com/upload/public/pdf/source/20211010/C2846043_7FA705E1F14A2906F6A2AFA45FA28209.pdf, Device=CH343G, LCSC Part Name=CH343G, Manufacturer Part=CH343G, Name=CH343G, Protocol=-, Supplier=LCSC, Supplier Footprint=SOP-16, Supplier Part=C2844153, Symbol=CH343G
U3: library part HX711_C6705483, JLCPCB Part Class=扩展库, Manufacturer=AVIA(海芯科技), Add into BOM=yes, Convert to PCB=yes, Device=HX711_C6705483, LCSC Part Name=HX711, Manufacturer Part=HX711, Name=HX711, Supplier=LCSC, Supplier Footprint=SOP-16, Supplier Part=C6705483, Symbol=HX711_C6705483
U4: Input Voltage=2.5V~5.5V, JLCPCB Part Class=扩展库, Manufacturer=TI(德州仪器), Operating Temperature=-40℃~+125℃@(TJ), Output Current (Max)=1A, Output Voltage=600mV~5.5V, Switching Frequency=1.5MHz, Add into BOM=yes, Convert to PCB=yes, Datasheet=https://www.ti.com/cn/lit/gpn/tlv62568, Device=TLV62568DBVR, Function=降压型, LCSC Part Name=TLV62568DBVR, Manufacturer Part=TLV62568DBVR, Name=TLV62568, Number of Outputs=1, Output Type=可调, Supplier=LCSC, Supplier Footprint=SOT-23-5, Supplier Part=C163219, Switch tube (built-in/external)=内置, Symbol=TLV62568DBVR, Synchronous Rectification=是, Topology=降压式
U5: Input Voltage=4.5V~24V, JLCPCB Part Class=扩展库, Manufacturer=MPS(芯源), Operating Temperature=-40℃~+125℃@(TJ), Output Current (Max)=3A, Output Voltage=800mV~22.8V, Switching Frequency=500kHz, Add into BOM=yes, Convert to PCB=yes, Datasheet=https://atta.szlcsc.com/upload/public/pdf/source/20240315/E986BDF075E08D3649664A84BD5F173B.pdf, Device=MP2315GJ-Z, Function=降压型, LCSC Part Name=MP2315GJ-Z, Manufacturer Part=MP2315GJ-Z, Name=MP2315GJ-Z, Number of Outputs=1, Output Type=可调, Supplier=LCSC, Supplier Footprint=TSOT-23-8, Supplier Part=C45889, Switch tube (built-in/external)=内置, Symbol=MP2315GJ-Z, Synchronous Rectification=是, Topology=降压式
U6: JLCPCB Part Class=扩展库, Manufacturer=TI(德州仪器), Add into BOM=yes, Convert to PCB=yes, Datasheet=https://www.ti.com/cn/lit/gpn/drv8871, Device=DRV8871DDA, LCSC Part Name=DRV8871DDA, Manufacturer Part=DRV8871DDA, Name=DRV8871DDA, Supplier=LCSC, Supplier Footprint=SO-8-EP, Supplier Part=C1556867, Symbol=DRV8871DDA
U7: JLCPCB Part Class=扩展库, LCSC Part Name=红外传感信号处理器, Manufacturer=UMW(友台半导体), Add into BOM=yes, Convert to PCB=yes, Datasheet=https://atta.szlcsc.com/upload/public/pdf/source/20231109/48CCA2F2187B39D45C76AC1FEDDCACA0.pdf, Device=BISS0001, Manufacturer Part=BISS0001, Name=BISS0001, Supplier=LCSC, Supplier Footprint=SOP-16, Supplier Part=C404323, Symbol=BISS0001_C404323
USB1: Current Rating - Power (Max)=5A, JLCPCB Part Class=扩展库, LCSC Part Name="Type-C 母 卧贴", Manufacturer=XUNPU(讯普), Operating Temperature Range=-40℃~+85℃, Soldering Temperature(Max)=260℃, Add into BOM=yes, Connector Type=Type-C, Convert to PCB=yes, Datasheet=https://atta.szlcsc.com/upload/public/pdf/source/20210528/C2835315_A76BD3CF9329D12B6041421AD23BFD66.pdf, Device=TYPEC-304J-BCP16, Gender=母, Manufacturer Part=TYPEC-304J-BCP16, Mounting Style=卧贴, Name=TYPEC-304J-BCP16, Number of Contacts=16P, Number of Ports=1, Standard="USB 3.1", Supplier=LCSC, Supplier Footprint=SMD, Supplier Part=C2835315, Symbol=TYPEC-304J-BCP16

## Via types
v1: diameter 24, hole 12, Top Layer to Bottom Layer, 32 vias
v2: diameter 50, hole 28, Top Layer to Bottom Layer, 2 vias

## Nets (pads, with @x,y where several pads share a name; then routed paths per layer and width w, separated by ;. In a path a pad name is that pad's centre, name@x,y a point inside that pad or via, vN(x,y) a via of type N, cw(c..) or ccw(c..) an arc to the next point about the centre after c; other vN are vias at no path point)
+3V3: C4.2 C10.2 C32.1 C52.1 L2.2 P3.3 P19.1 P24.1 P28.1 P28.3 P28.5 R20.2 R21.1 R29.1 R30.1 R31.1 R32.1 R33.2 R34.2 R36.1 R37.2 R38.2 R39.1 R41.1 R43.1 R46.1 R47.1 R48.1 R50.1 R51.1 R52.1 R55.1 U1.2 U3.16 U7.8 U7.11 | length 12619.8
  Top Layer w20: 340,2790 347.5,2782.5 887.5,2782.5 ; R29.1 860.43,2369.57 830.47,2399.53 830.47,2480.47 855,2505 887.5,2505 ; P3.3 920,2505 887.5,2505 ; P19.1 990,2815 ; 1050,1595 1045.43,1599.57 C32.1 1045.43,1866.48 U7.8 1080,1890 1180,1990 U7.11 ; R37.2 990,2815 ; 1460,1600 1465.43,1605.43 R21.1 ; R21.1@1465.43,1748.94 R21.1 ; R20.2 1624.16,1879.16 1624.16,1834.16 1535,1745 R21.1 ; U3.16 2096.91,1928.09 P24.1 ; 2410,1620 2785,1995 3034.57,1995 R39.1 ; 2468.31,1538.31 2690,1760 3039.57,1760 R43.1 ; R52.1 3300.43,3349.57 3350,3300 R34.2 R33.2 ; R47.1 R48.1 3435.43,2789.57 3395,2830 3395,2885 3430,2920 3745,2920 ; 887.5,2505 887.5,2782.5 ; 887.5,2782.5 920,2815 990,2815
  Top Layer w40: R38.2 355,3310 350,3305 345,3310 345,3445 704.57,3804.57 C4.2 1095.73,3805.3 1150.3,3805.3 1182.52,3837.52 U1.2 ; R55.1 2150,999.57 v1(2150,1000) ; v1(2180,1205) 2180,1245 ; R41.1 3084.57,1450 ; R30.1 R31.1 3229.57,605.43 3084.57,750.43 3084.57,905 ; R50.1 R32.1 3085,905.43 3084.57,905 ; R46.1 R51.1 3090,1225.43 3084.57,1220 ; R52.1 3450,3650 3745,3355 3745,2920 3745,1490 3705,1450 3084.57,1450 ; 3084.57,905 3084.57,1220 ; 3084.57,1220 3084.57,1450
  Top Layer w50: L2.2 L2.2@2185,1308.31
  Bottom Layer w20: v1(2110,1600) P24.1
  Bottom Layer w40: v1(2150,1000) 2180,1030 v1(2180,1205)
+5: C9.2 C16.2 C17.2 C18.1 C19.2 D1.1 L1.2 P4.1 P4.3 P4.5 P24.3 R12.2 R49.1 U4.1 U4.4 | length 4158.2
  Top Layer w20: U4.4 2027.6,1202.4 2045,1185 2045,1145 2062.4,1127.6 U4.1
  Top Layer w40: R12.2 v2(1060,1495) ; 1970,1235 v2(1970,1325) ; v1(2190,2625) 2335,2770 2510,2770 2591.69,2851.69 D1.1
  Top Layer w60: P4.5 P4.3 P4.1 840,1265 840,1380.29 875.15,1415.43 C19.2 R12.2
  Bottom Layer w40: v2(1060,1495) 1155,1590 1705,1590 v2(1970,1325) 2310,1665 P24.3 2310,2505 v1(2190,2625)
+12: C11.1 C12.2 C13.2 D2.1 P25.2 R8.2 R53.2 SW3.5 U5.2 | length 1197
  Top Layer w15: R8.2 v1(1255,1475)
  Top Layer w70: D2.1 960.98,760.63 1008.99,760.63 1050,719.62 1050,550
  Bottom Layer w15: C11.1 1254.37,1474.37 v1(1255,1475)
D+: U2.5 USB1.A6 USB1.B6 | length 448
  Top Layer w10: USB1.A6 2714.84,3690.16 2705,3700 2685,3700 2675.47,3690.47 USB1.B6 2675.47,3585.47 2655,3565 2655,3460.86 2660.86,3455 2720,3455 2730,3465 U2.5
D-: U2.6 USB1.A7 USB1.B7 | length 233.5
  Top Layer w10: U2.6 2680,3560 2714.84,3594.84 2714.84,3615 ; USB1.A7 2695.16,3620.86 2701.01,3615 2714.84,3615 ; USB1.B7 2734.53,3620.86 2728.67,3615 2714.84,3615
DTR: Q1.2 Q1.4 U2.10 | length 228.6
  Top Layer w10: Q1.4 2621.61,3099.9 2647.2,3125.49 Q1.2 2647.2,3197.8 2630,3215 U2.10
E+: C6.2 CN3.1 Q2.3 R6.1 U3.3 | length 2171.2
  Top Layer w20: U3.3@2323.48,2209.61 U3.3 2370.97,2210 2476.4,2104.57 R6.1 ; Q2.3 2570,2050.63 C6.2 2629.57,2104.57 2650,2125 2650,2444.59 2775.41,2570 3210,2570 3590,2190 3590,2030 3652.64,1967.36 CN3.1
EN: C39.2 P1.2 Q1.6 R38.1 SW1.1 U1.3 | length 3557.2
  Top Layer w10: P1.2 2560,3030 2660,3030 2672.8,3042.8 Q1.6
  Top Layer w20: SW1.1 740.43,2938.94 C39.2 R38.1 740.43,3369.57 685,3425 685,3695 740,3750 1155,3750 1192.52,3787.52 U1.3
  Bottom Layer w20: SW1.1 899.37,2780 2310,2780 P1.2
"ESP RXD0": P2.1 R1.2 U1.34 | length 692.4
  Top Layer w20: U1.34 2127.48,3687.52 2195,3620 2195,3425 P2.1 2419.57,3355 R1.2
"ESP TXD0": P2.2 R2.2 U1.35 | length 649.1
  Top Layer w20: U1.35 2142.48,3737.52 2265,3615 P2.2 2424.57,3455 R2.2
GND: C1.2 C2.2 C3.2 C4.1 C5.1 C6.1 C8.2 C9.1 C10.1 C11.2 C12.1 C13.1 C14.1 C16.1 C17.1 C18.2 C26.2 C28.2 C29.1 C30.2 C31.2 C32.2 C33.1 C34.1 C35.1 C38.2 C39.1 C40.1 C41.2 C42.2 C44.1 C45.1 C47.1 C51.1 CN3.2 CN4.1 CN4.2 CN5.1 CN5.2 CN6.1 D2.2 LED1.2 LED2.2 LED3.2 P3.1 P4.2 P4.4 P4.6 P8.1 P9.1 P10.1 P19.2 P20.1 P21.1 P22.1 P23.1 P26.1 P28.2 P28.4 P28.6 Q3.1 Q4.1 Q5.1 Q6.1 R7.1 R11.1 R23.2 R24.2 R25.2 R54.1 R56.2 SW1.4 SW2.4 SW3.2 U1.1 U1.15 U1.38 U1.39 U2.1 U3.5 U3.9 U3.10 U3.14 U3.15 U4.2 U5.1 U5.4 U7.7 USB1.13 USB1.14 USB1.15 USB1.16 USB1.A1B12 USB1.B1A12 | length 12542.9
  Top Layer w20: P3.1 690,2445 632.6,2387.6 Q3.1 520,2138.03 520,1875 565.43,1829.57 710,1829.57 ; C30.2 739.57,1979.57 705,1945 705,1834.57 710,1829.57 ; U7.7 1021.52,1939.61 989.61,1939.61 965,1915 965,1824.57 C32.2 974.57,1811.06 960.94,1797.44 957.01,1797.44 929.57,1770 854.57,1770 C31.2 710,1829.57 ; C14.1 v1(1165,1480) ; SW2.4@1413.94,3025.47 SW2.4 1412.05,3176.77 U1.15 1413.94,3273.94 1550,3410 1550,3525 ; R24.2 R25.2 1510,1974.57 R23.2 C26.2 1775.19,1974.57 C38.2 ; v1(1690,2930) 1690.43,2930 C40.1 1775,2936.35 LED1.2 ; C29.1 1799.57,2199.57 ; C28.2 1844.37,2244.37 1799.57,2199.57 ; U1.38 2357.91,3887.52 C2.2 2477.47,3795.43 USB1.16 USB1.14 2564.76,3657.31 USB1.B1A12 ; U4.2 2260.43,1165 C10.1 ; U3.14 2086.48,2199.57 1799.57,2199.57 ; U3.10 2195,2410 ; U3.9 2195,2460 2200,2455 ; C5.1@2195,2034.57 C5.1 ; 2200,2310 U3.5 2390,2310 2405.43,2325.43 R7.1 2574.13,2325.43 C8.2 2570,2299.57 C6.1 ; C1.2 2809.57,3000 ; USB1.A1B12 2845.24,3657.31 USB1.13 ; C3.2 2809.57,3000 ; USB1.15 USB1.13 ; Q4.1 2959.37,2124.37 v1(2980,2145) ; U2.1 2953.09,3513.09 v1(2975,3535) ; Q5.1 2969.37,1654.37 v1(2985,1670) ; Q6.1 2933.03,1900 v1(2980,1900) ; P23.1 3079.57,3699.57 C47.1 3042.23,3687.34 USB1.13 ; 3390,940.47 3679.53,940.47 ; C51.1 3689.57,1225.43 ; C33.1@3409.57,665 3685,665 ; CN5.1 3639.85,2999.57 C41.2 3365,2909.57 C42.2 3320.43,2755 2715,2755 2655,2815 2655,2965 2695,3005 2804.57,3005 2809.57,3000
  Top Layer w40: SW1.4 669.57,3136.1 C39.1 ; C4.1 1107.09,3887.52 U1.1 U1.38 ; C34.1 C33.1 ; C35.1 3390,940.47 C45.1 ; C51.1 C44.1 ; 3679.53,940.47 3685,935 ; 3689.57,1225.43 3690,1225
  Top Layer w70: 573.67,735.33 594,715 594,616.01 680,530 SW3.2 ; 950,1020 955,1025 R11.1 ; LED3.2 v1(1838.65,1333.65) 1935,1430 LED2.2 ; 1865,725 1875,735 2539,735 R54.1 ; 2280,745 v1(2280,1050) C10.1
  Bottom Layer w20: USB1.13 2875.28,3634.72 v1(2975,3535)
  other v1: 1370,895 1370,935 1370,975
IO0: C40.2 P1.1 Q1.3 R37.1 SW2.1 U1.25 | length 2253.7
  Top Layer w10: P1.1 2578.42,3148.42 Q1.3
  Top Layer w20: R37.1 1275.43,2780 1601.53,2780 SW2.1 1739.8,2774.57 C40.2 1784.52,2784.09 1819.09,2784.09 ; 1819.09,2789.09 1910,2880 1910,2941.73 1993.27,3025 U1.25
  Bottom Layer w20: SW2.1 2276.42,2846.42 P1.1
LED1: R35.1 U1.24 | length 139.6
  Top Layer w20: R35.1 1863.94,3059.37 U1.24
motor_out1: CN2.1 U6.6 | length 359
  Top Layer w50: CN2.1 2776.57,336.57 2830,390 U6.6
motor_out2: CN2.2 U6.8 | length 354.9
  Top Layer w50: U6.8 2930,378.82 2973.42,335.39 CN2.2
MTCK: P19.3 U1.16 | length 683.2
  Top Layer w20: P19.3 1150,2885 1270,2885 1320,2935 1440,2935 1505,3000 1505,3065 1463.94,3106.06 U1.16
MTDI: P19.5 U1.14 | length 331.7
  Top Layer w20: P19.5 1284.6,3039.6 U1.14
MTDO: P19.6 U1.23 | length 808.1
  Top Layer w20: v1(1765,3290) 1813.94,3241.06 U1.23
  Bottom Layer w20: P19.6 1435,3290 v1(1765,3290)
MTMS: P19.4 U1.13 | length 394.6
  Top Layer w20: P19.4 1090,3215 1162.52,3287.52 U1.13
NetC5_2: C5.2 P24.2 Q2.2 U3.1 | length 410.2
  Top Layer w20: P24.2 2270.43,1975.43 C5.2 2325,2030 ; U3.1 2323.09,2031.91 2325,2030 ; Q2.2 2343.23,2030 2325,2030
NetC7_1: C7.1 R4.1 U3.8 | length 198.6
  Top Layer w20: R4.1@2310,2644.57 R4.1 C7.1 2309.57,2460.95 2310.51,2460 U3.8
NetC7_2: C7.2 R5.1 U3.7 | length 249.6
  Top Layer w20: U3.7 2384.57,2410 R5.1 2380.43,2514.13 C7.2
NetC8_1: C8.1 U3.6 | length 272.4
  Top Layer w20: U3.6 2400,2360 2425.43,2385.43 C8.1
NetC15_1: C15.1 L1.1 U5.3 | length 120.7
  Top Layer w15: U5.3 1247.79,1092.79 1255,1100 1325,1100
NetC15_2: C15.2 R9.2
NetC19_1: C19.1 R10.2 R11.2 R12.1
NetC20_1: C20.1 C21.1 P25.1 R53.1 U6.5 | length 244.9
  Top Layer w50: P25.1 2369.43,430 R53.1
NetC20_2: C20.2 C21.2 P25.3 R13.2 R54.2 U6.1 U6.7 U6.9 | length 539.9
  Top Layer w20: U6.9 2880,595 U6.7 ; 2930,650 U6.1
  Top Layer w50: P25.3 2264.57,664.57 R54.2
NetC22_1: C22.1 R14.2 R15.1 U7.13 | length 781.3
  Top Layer w20: U7.13 1175,2090 1155,2110 1155,2290 1180,2315 1255,2315 1290.43,2350.43 R15.1 1374.57,2519.13 R14.2 C22.1
NetC22_2: C22.2 RL1.1 RL1.2 U7.12 | length 1209.5
  Top Layer w20: RL1.1 RL1.2 ; U7.12 1165,2040 1121.59,2083.42 RL1.2 ; C22.2 1445.43,2699.57 1425,2720 1201.59,2720 RL1.2
NetC23_1: C23.1 C27.1 R18.1 R22.1 U7.15 | length 150.9
  Top Layer w20: U7.15 1385.43,2190 C27.1
NetC23_2: C23.2 C29.2 | length 95
  Top Layer w20: C23.2 C29.2
NetC24_1: C24.1 C25.1 R17.1
NetC24_2: C24.2 C27.2 R18.2 U7.16 | length 159.5
  Top Layer w20: U7.16 1278.52,2270.43 C27.2
NetC25_2: C25.2 R14.1 R17.2 | length 174.1
  Top Layer w20: R14.1 C25.2 R17.2
NetC26_1: C26.1 CN6.3 R16.2 R23.1 | length 3514.9
  Top Layer w20: R16.2 1560.43,2110 R23.1 C26.1 1804.57,2135 1930,2135 2015,2050 2015,1855 2065,1805 2440,1805 2690,2055 2690,2345 2875,2530 3207.57,2530 3547.57,2190 3547.57,1842.43 CN6.3
NetC28_1: C28.1 R22.2 | length 333.5
  Top Layer w20: R22.2 1765.63,2461.06 C28.1
NetC30_1: C30.1 RT1.1 RT1.2 U7.4 | length 565.6
  Top Layer w20: RT1.1 RT1.2 635.43,2050.43 C30.1 890.43,2050.43 930,2090 U7.4
NetC31_1: C31.1 R28.2 U7.5 | length 249.3
  Top Layer w20: R28.2 880,1985 935,2040 U7.5
NetC33_2: C33.2 P8.2 R30.2 U1.26 | length 3891
  Top Layer w20: U1.26 2072.48,3287.52 v1(2090,3270) ; R30.2 C33.2 3554.57,755.43 P8.2
  Bottom Layer w20: v1(2090,3270) 2330,3030 2620,3030 3135,2515 3135,910 3320,725 P8.2
NetC34_2: C34.2 P9.2 R31.2 U1.12 | length 4764.8
  Top Layer w20: U1.12 1287.08,3340 v1(1385,3340) ; R31.2 C34.2 3514.57,534.57 P9.2
  Bottom Layer w20: v1(1385,3340) 1770,3340 2120,2990 2605,2990 3090,2505 3090,770 3255,605 P9.2
NetC35_2: C35.2 P10.2 R32.2 U1.11 | length 4553.8
  Top Layer w20: U1.11 1388.91,3387.52 v1(1388.98,3387.59) ; R32.2 C35.2 3539.57,834.57 P10.2
  Bottom Layer w20: v1(1388.98,3387.59) 1792.41,3387.59 1855,3325 2100,3325 2355,3070 2635,3070 3175,2530 3175,975 3270,880 P10.2
NetC38_1: C38.1 R19.2 R20.1 | length 349.7
  Top Layer w20: R20.1 R19.2 1779.57,1919.57 1840,1980 1910,1980 1924.37,1994.37 C38.1
NetC41_1: C41.1 CN5.3 R33.1 U1.36 | length 2243
  Top Layer w20: U1.36 v1(2102.48,3787.52) ; C41.1 R33.1 3593,3149.57 CN5.3
  Bottom Layer w20: v1(2102.48,3787.52) 2392.48,3787.52 2425,3755 2927.49,3755 2982.49,3700 3210,3700 3653.23,3256.77 3653.23,3254.97 3670,3238.2 CN5.3
NetC42_1: C42.1 CN4.3 R47.2 U1.6 | length 3415.9
  Top Layer w20: U1.6 1352.52,3637.52 v1(1375,3660) ; C42.1 R47.2 3609.57,2639.57 CN4.3
  Bottom Layer w20: v1(1375,3660) 1450,3735 2380,3735 2500,3615 2820,3615 2965,3470 3295,3470 3605,3160 3605,2765 CN4.3
NetC44_2: C44.2 P22.2 R46.2 U1.7 | length 4728.8
  Top Layer w20: U1.7 1367.52,3587.52 v1(1400,3620) ; R46.2 C44.2 3494.57,1375.43 P22.2
  Bottom Layer w20: v1(1400,3620) 1475,3695 2365,3695 2480,3580 2800,3580 2945,3435 3250,3435 3565,3120 3565,2750 3585,2730 P22.2
NetC45_2: C45.2 P20.2 R50.2 U1.29 | length 3802
  Top Layer w20: U1.29 v1(2081.41,3437.52) ; R50.2 C45.2 3529.57,1055.43 P20.2
  Bottom Layer w20: v1(2081.41,3437.52) 2195,3323.93 2195,3295 2370,3120 2645,3120 3210,2555 3210,1060 3270,1000 P20.2
NetC47_2: C47.2 P23.2 R52.2 U1.37 | length 1501.4
  Top Layer w20: U1.37 2091.57,3837.52 v1(2091.75,3837.7) ; C47.2 R52.2 3240,3660.43 P23.2
  Bottom Layer w20: v1(2091.75,3837.7) 2402.3,3837.7 2455,3785 2960,3785 2995,3820 3180,3820 P23.2
NetC51_2: C51.2 P21.2 R51.2 U1.33 | length 4036.5
  Top Layer w20: U1.33 2076.39,3637.52 v1(2076.54,3637.66) ; R51.2 C51.2 3429.57,1115 3535,1115 P21.2
  Bottom Layer w20: v1(2076.54,3637.66) 2367.34,3637.66 2455,3550 2735,3550 2885,3400 3225,3400 3525,3100 3525,1225 P21.2
NetC52_2: C52.2 R55.2 R56.1 U4.5
NetCN1_1: CN1.1 SW3.1 | length 2.2
  Top Layer w40: SW3.1@765,449.68 SW3.1
NetCN1_2: CN1.2 SW3.4 | length 2.2
  Top Layer w40: SW3.4@961.85,449.69 SW3.4
NetCN4_4: CN4.4 R48.2 | length 240.7
  Top Layer w20: R48.2 3608,2860.43 CN4.4
NetCN5_4: CN5.4 R34.1 | length 234
  Top Layer w20: R34.1 3624.13,3370.87 CN5.4
NetCN6_2: CN6.2 R19.1 | length 2667.9
  Top Layer w20: R19.1 1850.43,1876.06 1981.5,1745 2465,1745 2730,2010 2730,2150 2855,2275 3410,2275 3495,2190 3495,1795.01 CN6.2
NetL2_1: L2.1 U4.3
NetLED1_1: LED1.1 R35.2 | length 123.7
  Top Layer w20: LED1.1 1920.43,2999.08 R35.2 R35.2@1921.35,3044.08
NetLED2_1: LED2.1 R36.2 | length 98.7
  Top Layer w50: LED2.1 R36.2 R36.2
NetLED3_1: LED3.1 R49.2 | length 95.5
  Top Layer w50: R49.2 1688.69,1415.04 LED3.1
NetP3_2: P3.2 U7.1 | length 263.8
  Top Layer w20: P3.2 1021.91,2303.09 U7.1
NetP5_1: P5.1 U1.5 | length 218.4
  Top Layer w20: P5.1 1145,3630 1202.52,3687.52 U1.5
NetP5_2: P5.2 Q3.3 R29.2 | length 1631.5
  Top Layer w20: Q3.3 R29.2@770.2,2329.37 ; v1(705,2380) 719.57,2380 R29.2@770.2,2329.37 ; R29.2 R29.2@770.2,2329.37
  Bottom Layer w20: v1(705,2380) 705,2685 645,2745 645,3225 885,3465 885,3525 P5.2
NetP6_1: P6.1 U1.8 | length 208.1
  Top Layer w20: P6.1 1122.52,3537.52 U1.8
NetP6_2: P6.2 U6.2 | length 4839.1
  Top Layer w20: v1(2825,990) 2880,935 U6.2
  Bottom Layer w20: P6.2 710,3225 710,2755 765,2700 2570,2700 2825,2445 v1(2825,990)
NetP7_1: P7.1 U1.9 | length 239.1
  Top Layer w20: P7.1 1197.52,3487.52 U1.9
NetP7_2: P7.2 U6.3 | length 4824.6
  Top Layer w20: U6.3 v1(2830,885)
  Bottom Layer w20: P7.2 750,3140 750,2775 785,2740 2800,2740 2880,2660 2880,935 v1(2830,885)
NetP13_1: P13.1 Q4.3 | length 529.4
  Top Layer w20: Q4.3 2950.63,2045.63 3010,2105 3310,2105 P13.1
NetP13_2: P13.2 R39.2 | length 114.6
  Top Layer w20: R39.2 P13.2
NetP14_1: P14.1 U1.30 | length 2110.1
  Top Layer w20: U1.30 v1(2083.37,3487.52)
  Bottom Layer w20: v1(2083.37,3487.52) 2187.52,3487.52 2210,3510 2310,3510 3370,2450 P14.1
NetP14_2: P14.2 R40.1 | length 114.6
  Top Layer w20: R40.1 P14.2
NetP15_1: P15.1 Q5.3 | length 520.3
  Top Layer w20: Q5.3 2965.63,1575.63 3015,1625 3310,1625 P15.1
NetP15_2: P15.2 R41.2 | length 114.6
  Top Layer w20: R41.2 P15.2
NetP16_1: P16.1 U1.10 | length 3871.6
  Top Layer w20: U1.10 1387.52,3437.52 v1(1400,3450)
  Bottom Layer w20: v1(1400,3450) 1415,3465 1545,3595 2352.43,3595 2707.43,3240 3275,3240 3460,3055 3460,1775 P16.1
NetP16_2: P16.2 R42.1 | length 114.6
  Top Layer w20: R42.1 P16.2
NetP17_1: P17.1 Q6.3 | length 518.8
  Top Layer w20: Q6.3 2895.63,1820 2975,1820 3020,1865 3310,1865 P17.1
NetP17_2: P17.2 R43.2 | length 114.6
  Top Layer w20: R43.2 P17.2
NetP18_1: P18.1 U1.31 | length 2448.3
  Top Layer w20: U1.31 v1(2082.16,3537.52)
  Bottom Layer w20: v1(2082.16,3537.52) 2083.24,3537.52 2090.76,3530 2175,3530 2195,3550 2335,3550 3420,2465 3420,1975 P18.1
NetP18_2: P18.2 R44.1 | length 114.6
  Top Layer w20: R44.1 P18.2
NetP26_2: P26.2 U1.4 | length 529.5
  Top Layer w20: P26.2 905,3700 1155,3700 1192.52,3737.52 U1.4
NetQ2_1: Q2.1 U3.2 | length 204.6
  Top Layer w20: U3.2 2365,2160 2425.63,2099.37 Q2.1
NetQ3_2: Q3.2 R26.2 | length 94.9
  Top Layer w20: Q3.2 738.03,2220 R26.2
NetQ4_2: Q4.2 R40.2 | length 294.2
  Top Layer w20: Q4.2 2853.89,2125.66 2853.89,2163.89 2880,2190 3059.23,2190 3066.67,2182.56 3070.94,2182.56 3084.57,2168.94 R40.2
NetQ5_2: Q5.2 R42.2 | length 292.3
  Top Layer w20: Q5.2 2857.6,1687.6 2895,1725 3044.57,1725 R42.2
NetQ6_2: Q6.2 R44.2 | length 286
  Top Layer w20: Q6.2 2857.6,1932.6 2885,1960 3049.57,1960 R44.2
NetR1_1: R1.1 U2.2 | length 483.7
  Top Layer w20: R1.1 2805,3365 2880,3440 U2.2
NetR2_1: R2.1 U2.3 | length 415.2
  Top Layer w20: R2.1 2500.43,3446.06 2514.06,3432.44 2517.99,3432.44 2535.43,3415 2780,3415 2830,3465 U2.3
NetR6_2: R6.2 R7.2 U3.4 | length 243.3
  Top Layer w20: U3.4 2479.57,2260 R7.2 R6.2
NetR9_1: R9.1 U5.5
NetR10_1: R10.1 U5.8
NetR13_1: R13.1 U6.4
NetR15_2: R15.2 RL1.3 | length 205.2
  Top Layer w20: R15.2 1220,2435.43 RL1.3
NetR16_1: R16.1 U7.14 | length 158.5
  Top Layer w20: U7.14 1364.13,2140 R16.1
NetR21_2: R21.2 R24.1 U7.9 | length 262.2
  Top Layer w20: U7.9 1298.09,1840 R24.1 R21.2
NetR25_1: R25.1 U7.10 | length 150.6
  Top Layer w20: U7.10 1384.57,1940 R25.1
NetR26_1: R26.1 U7.2 | length 173.9
  Top Layer w20: R26.1 890.43,2190 U7.2
NetR27_1: R27.1 U7.3 | length 164
  Top Layer w20: R27.1 865,2140 U7.3
NetR27_2: R27.2 RT1.3 | length 212.2
  Top Layer w20: RT1.3 621.59,2135 R27.2
NetR28_1: R28.1 U7.6 | length 270.4
  Top Layer w20: R28.1 915.51,1829.57 930.94,1845 930.94,1950.94 970,1990 U7.6
NetU1_27: U1.27 U3.12 | length 1338.1
  Top Layer w20: U1.27 2102.48,3337.52 2145,3295 2145,2813.06 1950,2618.06 1950,2385 2025,2310 U3.12
NetU1_28: U1.28 U3.11 | length 1358.9
  Top Layer w20: U1.28 2157.95,3387.52 2200,3345.47 2200,2780 2005,2585 2005,2400 2045,2360 U3.11
RTS: Q1.1 Q1.5 R3.1 U2.11 | length 364.4
  Top Layer w10: Q1.5 2647.2,3097.2 2672.8,3122.8 Q1.1 2672.8,3192.8 2680,3200 ; U2.11 2680,3200 ; R3.1 2705,3175 2680,3200
S+: CN3.4 R4.2 | length 1484.4
  Top Layer w20: R4.2 2430.43,2695 3185,2695 3617.36,2262.64 CN3.4
S-: CN3.3 R5.2 | length 1414.6
  Top Layer w20: R5.2 2665.43,2620 3207.57,2620 3663.36,2164.21 CN3.3
SYNC: R8.1 U5.6 | length 199.5
  Top Layer w15: U5.6 1247.79,1336.97 R8.1
V3: C1.1 R3.2 U2.4 U2.15 | length 827.4
  Top Layer w20: U2.4 2780.39,3513.48 2780.39,3540.39 2835,3595 2975,3595 3015,3555 3015,3475 2880,3340 U2.15 2880,3175.43 R3.2 C1.1